# Altium PCB Charge.pcbdoc
Units mil, origin at the board's own origin, x right, y up, seen from the top; angles counter-clockwise.
Board outline 1110 x 2516.34 mil, 2 copper layers (Top Layer, Bottom Layer); 47 components, 34 nets, 137 pads, 73 vias.
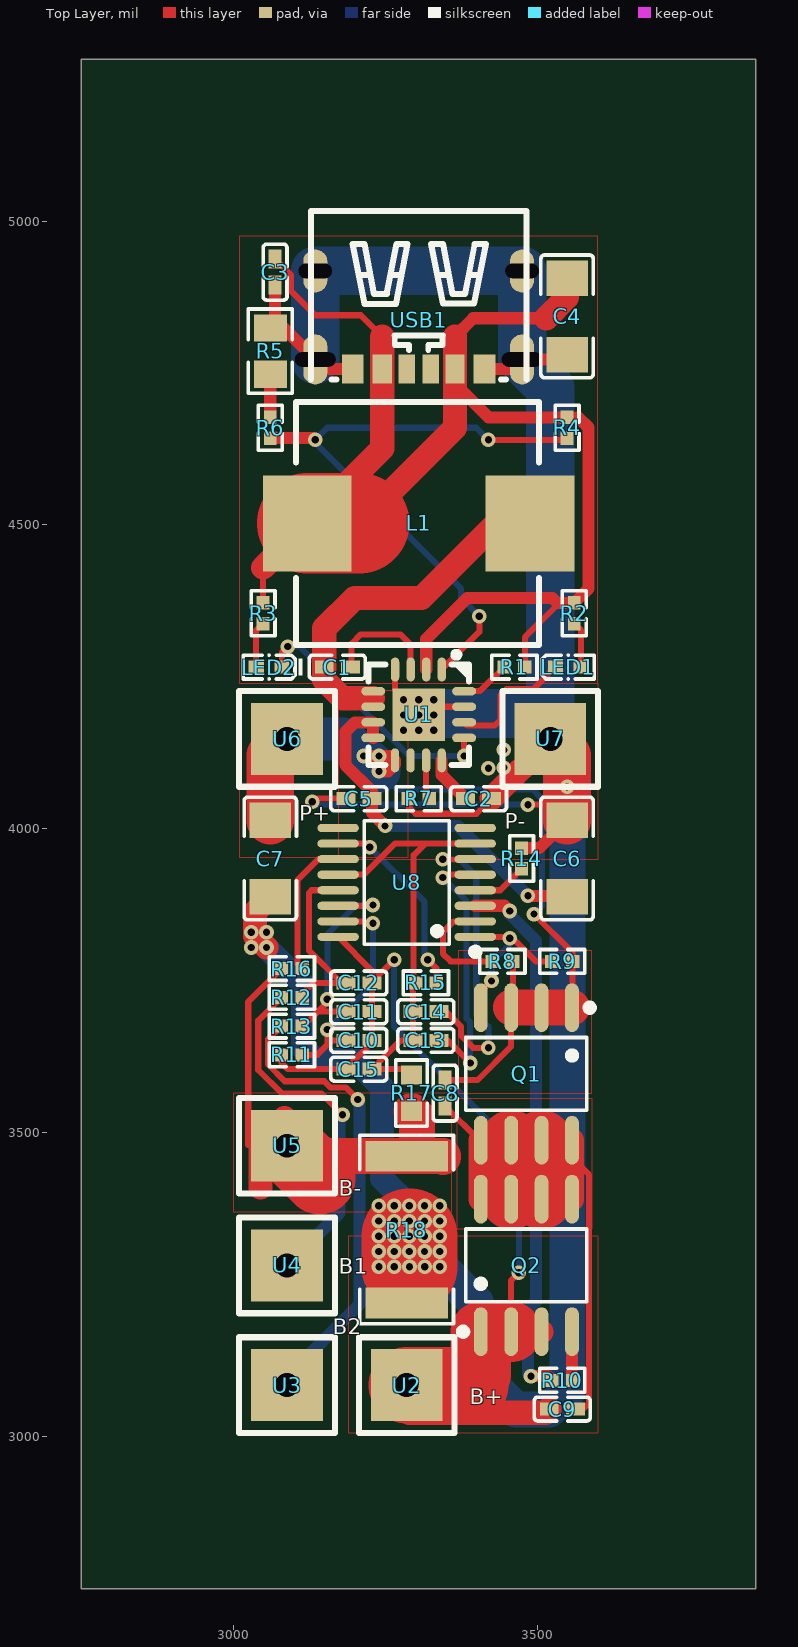
[diagram p0: Top Layer view]
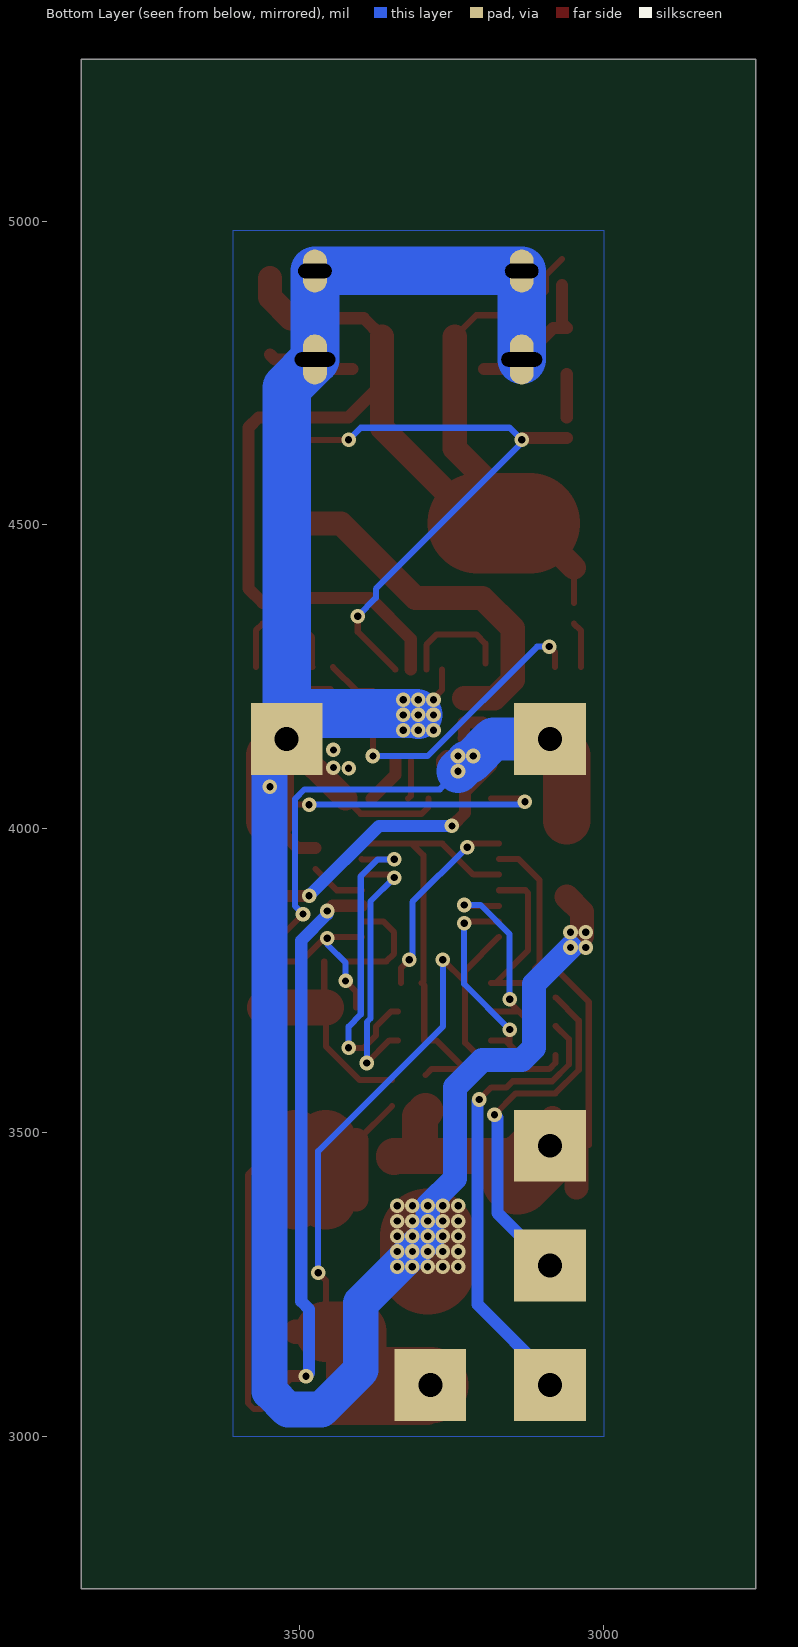
[diagram p1: Bottom Layer view, seen from below]

## Layer stack, top to bottom
Top Solder: solder mask 0.4, Solder Resist, Dk 3.5
Top Layer: signal copper 1.4
Dielectric 1: dielectric 12.6, FR-4, Dk 4.8
Bottom Layer: signal copper 1.4
Bottom Solder: solder mask 0.4, Solder Resist, Dk 3.5

## Board outline
3860,2750 2750,2750 2750,5266.34 3860,5266.34

## Components (designator, comment, footprint, x,y, rotation, side; value= is the part's Value field where it differs from the comment)
C1 "100nF" C0402 3171.42,4266.34 r0 top
C2 "470nF" C0402 3403.7,4049.8 r180 top
C3 "100nF" C0402 3069.06,4915.94 r90 top
C4 "CC1206KKX5R8BB226" C1206 3549.37,4843.11 r90 top
C5 "100nF" C0402 3206.85,4049.8 r0 top
C6 "CC1206KKX5R8BB226" C1206 3549.37,3951.38 r270 top
C7 "CC1206KKX5R8BB226" C1206 3061.18,3951.38 r90 top
C8 "100nF" C0402 3348.58,3565.55 r90 top
C9 "100nF" C0402 3541.5,3045.87 r0 top
C10 "100nF" C0402 3206.85,3652.17 r180 top
C11 "100nF" C0402 3206.85,3699.41 r180 top
C12 "100nF" C0402 3206.85,3746.65 r180 top
C13 "100nF" C0402 3317.09,3652.17 r0 top
C14 "100nF" C0402 3317.09,3699.41 r0 top
C15 "2.2uF" C0402 3206.85,3604.92 r180 top
L1 "2.2uH" IND-SMD_L10.8-W10.0 3305.28,4502.56 r0 top
LED1 "MHT136UGCT" LED0402-RD 3551.34,4266.34 r0 top
LED2 "MHT136CRCT" LED0402-RD 3059.21,4266.34 r180 top
Q1 "PT4407" SOP-8_L5.0-W4.0-P1.27-LS6.0-BL 3482.44,3597.05 r180 top
Q2 "PT4407" SOP-8_L5.0-W4.0-P1.27-LS6.0-BL 3482.44,3282.09 r0 top
R1 "10K" R0402 3462.76,4266.34 r0 top
R2 "10K" R0402 3561.18,4354.92 r90 top
R3 "10K" R0402 3049.37,4354.92 r90 top
R4 "10K" R0402 3549.37,4660.04 r90 top
R5 "10KΩ" R0805 3061.18,4786.02 r270 top
R6 "10K" R0402 3061.18,4660.04 r90 top
R7 "5.6K" R0402 3305.28,4049.8 r0 top
R8 "5.1K" R0402 3443.07,3782.09 r0 top
R9 "1M" R0402 3541.5,3782.09 r0 top
R10 "5.1K" R0402 3541.5,3093.11 r0 top
R11 "1K" R0402 3096.61,3628.54 r0 top
R12 "1K" R0402 3096.61,3723.03 r0 top
R13 "1K" R0402 3096.61,3675.79 r0 top
R14 "1K" R0402 3474.57,3951.38 r270 top
R15 "1K" R0402 3317.09,3746.65 r0 top
R16 "1K" R0402 3096.61,3770.28 r0 top
R17 "51Ω" R0603 3293.46,3565.55 r270 top
R18 "0.03Ω" R2512 3285.59,3341.14 r90 top
U1 "SLM6803" QFN-16_L4.0-W4.0-P0.65-BL-EP2.2 3305.28,4187.6 r180 top
U2 "BATTERY" BATTERY 3285.59,3085.24 r0 top
U3 "BATTERY" BATTERY 3088.74,3085.24 r0 top
U4 "BATTERY" BATTERY 3088.74,3282.09 r0 top
U5 "BATTERY" BATTERY 3088.74,3478.94 r0 top
U6 "BATTERY" BATTERY 3088.74,4148.23 r0 top
U7 "BATTERY" BATTERY 3521.81,4148.23 r0 top
U8 "FM8254AAV" TSSOP-16_L5.0-W4.4-P0.65-LS6.4-BL 3285.59,3912.01 r90 top
USB1 "U262-061N-4BVC10" TYPE-C-SMD_TYPE-C-31-M-16 3305.28,4837.2 r180 top

## Footprints (in the part's own frame and the unit in brackets; to place one, negate y for a bottom-side part, rotate by r counter-clockwise, add the part's x,y. Pads: shape width x height; smd on the part's side, far side on the other; paste and mask are expansions set on the pad)
BATTERY [mm]
  rect 3x3 hole 1: 1(0,0)
  silkscreen extent -2,-2 2,2
C0402 [mm]
  rect 0.79x0.54 smd: 1(-0.545,0) 2(0.545,0)
  silkscreen extent -1.17,-0.5 1.17,0.5
C1206 [mm]
  rect 1.485x1.728 smd: 1(-1.593,0) 2(1.593,0)
  silkscreen extent -2.56,-1.09 2.56,1.09
IND-SMD_L10.8-W10.0 [mm]
  rect 3.7x4 smd: 1(-4.65,0) 2(4.65,0)
  silkscreen extent -5.13,-5.08 5.03,5.08
LED0402-RD [mm]
  rect 0.636x0.54 smd: 1(-0.538,0) 2(0.538,0)
  silkscreen extent -1.39,-0.54 1.09,0.54
QFN-16_L4.0-W4.0-P0.65-BL-EP2.2 [mm]
  oval 0.35x1 smd: 1(-0.965,-1.9) 2(-0.315,-1.9) 3(0.335,-1.9) 4(0.986,-1.9) 9(0.991,1.9) 10(0.34,1.9) 11(-0.31,1.9) 12(-0.96,1.9)
  oval 1x0.35 smd: 5(1.9,-0.991) 6(1.9,-0.34) 7(1.9,0.31) 8(1.9,0.96) 13(-1.9,0.96) 14(-1.9,0.31) 15(-1.9,-0.34) 16(-1.9,-0.991)
  rect 2.2x2.2 smd: 17(0,0)
  silkscreen extent -2.11,-2.64 2.1,2.1
R0402 [mm]
  rect 0.566x0.54 smd: 1(-0.433,0) 2(0.433,0)
  silkscreen extent -0.94,-0.5 0.94,0.5
R0603 [mil]
  rect 31.75x34.02 smd: 1(-29.66,0) 2(29.66,0)
  silkscreen extent -55,-26 55,26
R0805 [mil]
  rect 44.59x54.21 smd: 1(-38.04,0) 2(38.04,0)
  silkscreen extent -69,-36 69,36
R2512 [mil]
  rect 50.49x136.06 smd: 1(-120.72,0) 2(120.72,0)
  silkscreen extent -155,-77 155,77
SOP-8_L5.0-W4.0-P1.27-LS6.0-BL [mil]
  oval 22.6x80.14 smd: 1(-75,-108.97) 2(-25,-108.97) 3(25,-108.97) 4(75,-108.97) 5(75,108.97) 6(25,108.97) 7(-25,108.97) 8(-75,108.97)
  silkscreen extent -110,-115 99,60
TSSOP-16_L5.0-W4.4-P0.65-LS6.4-BL [mil]
  oval 13.5x68.17 smd: 1(-89.57,-112.82) 2(-63.98,-112.82) 3(-38.39,-112.82) 4(-12.79,-112.82) 5(12.8,-112.82) 6(38.39,-112.82) 7(63.98,-112.82) 8(89.57,-112.82) 9(89.57,112.82) 10(63.98,112.82) 11(38.39,112.82) 12(12.8,112.82) 13(-12.79,112.82) 14(-38.39,112.82) 15(-63.98,112.82) 16(-89.57,112.82)
  silkscreen extent -120,-119 101,70
TYPE-C-SMD_TYPE-C-31-M-16 [mm]
  oval 1x2.1 hole 0.6 slot 1.7 at 0 deg: 1(-4.32,1.65) 2(4.32,1.65)
  oval 1x1.8 hole 0.6 slot 1.4 at 0 deg: 3(-4.32,-2.05) 4(4.32,-2.05)
  rect 0.7x1.2 smd: A5(-0.5,2.05) B5(0.5,2.05)
  rect 0.8x1.2 smd: A9(1.52,2.05) B9(-1.52,2.05)
  rect 0.9x1.2 smd: A12(2.75,2.05) B12(-2.75,2.05)
  silkscreen extent -4.5,-4.55 4.5,2.49

## Via types
v1: diameter 24, hole 12, Top Layer to Bottom Layer, 73 vias

## Nets (pads, with @x,y where several pads share a name; then routed paths per layer and width w, separated by ;. In a path a pad name is that pad's centre, name@x,y a point inside that pad or via, vN(x,y) a via of type N, cw(c..) or ccw(c..) an arc to the next point about the centre after c; other vN are vias at no path point)
12V6: C7.2 C8.2 Q1.1 Q1.2 Q1.3 R8.2 R9.2 U1.9 U6.1 | length 1445.7
  Top Layer w10: C8.2 3402.01,3587.01 3457.44,3642.44 Q1.3 3460.11,3708.69 R8.2 ; v1(3495,3860) 3558.54,3796.46 R9.2 3558.54,3707.11 Q1.1
  Top Layer w20: v1(3215,4120) v1(3240,4120) 3259.07,4120 U1.9 3266.28,4106.28 3255,4095 v1(3240,4095)
  Top Layer w40: U6.1@3061.18,4120.67 U6.1
  Top Layer w59.06: Q1.3 Q1.2 Q1.1
  Top Layer w78.74: C7.2 U6.1@3061.18,4120.67
  Bottom Layer w10: v1(3240,4095) 3270,4065 3492.53,4065 3508,4049.53 3508,3873 v1(3495,3860)
  Bottom Layer w70.87: U6.1 3181.77,4148.23 3220,4110 3225,4110 v1(3240,4095)
$1N58: R1.1 U1.16 | length 82.1
  Top Layer w10: U1.16 3405.98,4226.6 R1.1
$1N75: LED1.1 U1.14 | length 215.6
  Top Layer w10: U1.14 3385.47,4170 3430,4170 3440,4180 3440,4220 3450,4230 3493.81,4230 LED1.1
$1N87: LED2.1 U1.13 | length 432
  Top Layer w10: LED2.1 3080.4,4290.4 v1(3090,4300) ; v1(3380,4120) 3380.08,4120.08 U1.13
  Bottom Layer w10: v1(3090,4300) 3110,4300 3290,4120 v1(3380,4120)
$1N121: C2.2 U1.12 | length 79.2
  Top Layer w20: U1.12 3343.08,4088.97 C2.2
$1N133: R7.2 U1.11 | length 65
  Top Layer w10: U1.11 3317.48,4054.64 R7.2
$1N189: R4.1 R6.1 U1.1 | length 1022.2
  Top Layer w10: U1.1 3405,4324.12 v1(3405,4350) ; v1(3420,4640) 3546.37,4640 R4.1
  Top Layer w20: R6.1 3132,4643 v1(3135,4640)
  Bottom Layer w10: v1(3405,4350) 3375,4380 3375,4395 3135,4635 v1(3135,4640) 3155,4660 3400,4660 v1(3420,4640)
$1N209: C5.2 C6.2 U1.7 U1.8 | length 606.7
  Top Layer w20: U1.8 3230.08,4150.2 U1.7@3230.08,4175 ; U1.7 U1.7@3230.08,4175 ; v1(3250,4005) 3228.31,4026.69 C5.2 3228.31,4061.69 3185,4105 3185,4160 3200,4175 U1.7@3230.08,4175 ; v1(3485,3890) 3548.05,3890 C6.2
  Bottom Layer w20: v1(3250,4005) 3370,4005 v1(3485,3890)
$1N240: C1.1 L1.2 U1.5 U1.6 | length 587.3
  Top Layer w40: 3230,4215 3180,4215 3149.96,4245.04 C1.1 3149.96,4329.96 3200,4380 3310,4380 3432.56,4502.56 L1.2
$1N241: C1.2 U1.3 | length 183.5
  Top Layer w10: C1.2@3195,4272.4 3195,4305 3210,4320 3275,4320 3292.08,4302.92 U1.3
$1N315: C8.1 C9.2 Q1.5 Q1.6 Q1.7 Q1.8 Q2.5 Q2.6 Q2.7 Q2.8 | length 1062.3
  Top Layer w10: C8.1 3404.6,3488.08 Q1.5 ; Q2.8 Q2.7 ; Q1.6 Q1.7 ; Q2.6 Q2.5 ; Q1.8@3557.44,3459.31 3585.74,3431.01 3585.74,3055.74 3575.87,3045.87 C9.2
  Top Layer w40: Q2.8 Q1.5 ; Q2.5 3557.44,3459.31 Q1.8
  Top Layer w100: Q2.7 Q1.6 ; Q2.6 Q1.7
$1N375: Q2.4 R10.2 | length 80.5
  Top Layer w20: Q2.4 3557.44,3094.21 R10.2
$1N376: R10.1 U8.3 | length 887.7
  Top Layer w20: U8.3 3446.38,3873.62 v1(3455,3865) ; v1(3490,3100) 3517.57,3100 R10.1
  Bottom Layer w20: v1(3455,3865) 3455,3859.6 3498,3816.6 3498,3223 3485,3210 3485,3105 v1(3490,3100)
$1N377: R8.1 U8.2 | length 182.3
  Top Layer w10: U8.2 3363.03,3848.03 3345,3830 3345,3795 3357.91,3782.09 R8.1
$1N378: Q1.4 R9.1 U8.1 | length 276.4
  Top Layer w10: U8.1 3452.56,3822.44 v1(3455,3820) 3460,3820 3497.91,3782.09 R9.1 ; Q1.4 3407.44,3732.44 v1(3425,3750)
  Bottom Layer w10: v1(3425,3750) 3425,3780 3455,3810 v1(3455,3820)
$1N390: R14.2 U8.4 | length 90.7
  Top Layer w10: U8.4 3439.45,3899.22 R14.2
$1N415: C13.2 U8.5 | length 445.9
  Top Layer w10: C13.2 3352.83,3652.17 v1(3390,3615) ; v1(3345,3920) 3349.81,3924.81 U8.5
  Bottom Layer w10: v1(3345,3920) 3384,3881 3384,3688.37 3390,3682.37 v1(3390,3615)
$1N416: C14.2 U8.6 | length 525.3
  Top Layer w10: C14.2 3350.59,3699.41 3375,3675 3375,3660 3395,3640 v1(3420,3640) ; v1(3345,3950) 3398.02,3950 U8.6
  Bottom Layer w10: v1(3345,3950) 3372,3950 3400,3922 3400,3695 3420,3675 v1(3420,3640)
$1N417: C13.1 C14.1 C15.1 R15.1 R17.1 U8.7 U8.12 | length 738
  Top Layer w10: U8.12 3214.81,3924.81 3265.99,3975.99 3315.99,3975.99 ; R17.1 3283.75,3604.92 C15.1 3275.55,3652.17 C13.1 C14.1 3295.63,3742.23 R15.1 3299.54,3746.65 3297,3749.2 3297,3957 3315.99,3975.99 ; U8.7 3315.99,3975.99
$1N485: R16.2 U8.11 | length 229.7
  Top Layer w10: R16.2 3106.2,3777.73 3106.2,3916.2 3140.4,3950.4 U8.11
$1N497: C12.2 R12.2 U8.13 | length 304.8
  Top Layer w10: R12.2 3113.65,3728.65 3131.65,3746.65 C12.2@3178.35,3746.65 ; U8.13 3129.22,3899.22 3125,3895 3125,3800 C12.2@3178.35,3746.65 ; C12.2 C12.2@3178.35,3746.65
$1N498: C11.2 R13.2 U8.14 | length 368.3
  Top Layer w10: R13.2 3115.79,3675.79 3139.41,3699.41 ; v1(3155,3720) 3155,3715 3139.41,3699.41 ; U8.14 3228.62,3873.62 v1(3230,3875) ; C11.2 3139.41,3699.41
  Bottom Layer w10: v1(3155,3720) 3155,3827 3203,3875 v1(3230,3875)
$1N516: C10.2 R11.2 U8.15 | length 371
  Top Layer w10: R11.2 3138.54,3628.54 3162.17,3652.17 C10.2 ; 3155,3645.06 v1(3155,3670) ; U8.15 3226.97,3848.03 v1(3230,3845)
  Bottom Layer w10: v1(3155,3670) 3230,3745 v1(3230,3845)
$1N621: R15.2 U8.10 | length 323.3
  Top Layer w10: U8.10 3219.01,3975.99 v1(3225,3970) ; v1(3320,3785) 3334.13,3770.87 R15.2
  Bottom Layer w10: v1(3225,3970) 3315,3880 3315,3790 v1(3320,3785)
$1N626: LED1.2 R2.1 | length 76.2
  Top Layer w10: R2.1 3572.53,4326.53 LED1.2
$1N627: LED2.2 R3.1 | length 76.2
  Top Layer w10: LED2.2 3038.02,4326.53 R3.1
$1N630: R5.2 R6.2 | length 70.9
  Top Layer w20: R6.2 R5.2
B1: R12.1 U4.1 | length 590
  Top Layer w10: R12.1 3041.44,3684.9 3041.44,3603.56 3080,3565 3145,3565 v1(3180,3530)
  Bottom Layer w20: U4.1 3175,3368.35 3175,3525 v1(3180,3530)
B2: R13.1 U3.1 | length 764.5
  Top Layer w10: R13.1 3079.07,3675.79 3057.44,3654.16 3057.44,3612.56 3085,3585 3150,3585 3160,3575 3185,3575 v1(3205,3555)
  Bottom Layer w20: U3.1 3088.74,3098.74 3208,3218 3208,3552 v1(3205,3555)
B+: C9.1 C10.1 C11.1 C12.1 C15.2 Q2.1 Q2.2 Q2.3 R11.1 U2.1 U8.16 | length 1714.7
  Top Layer w10: R11.1 3080,3628.12 3080,3615 3090.08,3604.92 C15.2 3185.39,3605.39 3228.31,3648.31 C10.1 C11.1 C12.1 C12.1@3228.31,3748.31 ; U8.16 3228.31,3766.89 C12.1@3228.31,3748.31 ; v1(3265,3785) C12.1@3228.31,3748.31 ; Q2.2 3457.44,3257.44 v1(3470,3270)
  Top Layer w40: U2.1 3285.59,3044.41 3290,3040 3514.17,3040 C9.1 ; Q2.2 Q2.3
  Top Layer w100: 3390.24,3085.24 3407.44,3102.44 Q2.1 Q2.2
  Top Layer w125.98: U2.1 3390.24,3085.24
  Bottom Layer w10: v1(3265,3785) 3265,3675 3470,3470 v1(3470,3270)
B-: R16.1 R17.2 R18.2 U5.1 | length 899.9
  Top Layer w10: 3025,3480 3025,3715.7 R16.1 ; U5.1@3030,3475 3045,3475 U5.1@3084.8,3475
  Top Layer w39.37: 3045,3410 3045,3475 3045,3485 U5.1@3084.8,3524.8
  Top Layer w59.06: U5.1@3107.68,3461.86 R18.2 ; R17.2 3302.43,3526.93 3302.43,3478.7 R18.2 ; R18.2@3345,3460 R18.2@3343.14,3461.86 ; R18.2@3345,3461.86 R18.2@3343.14,3461.86 ; R18.2 R18.2@3343.14,3461.86
  Top Layer w118.11: U5.1 U5.1@3142.68,3425
GND: C2.1 C3.1 C4.1 C5.1 C6.1 C7.1 R5.1 R7.1 R14.1 R18.1 U1.4 U1.15 U1.17 U7.1 USB1.1 USB1.2 USB1.3 USB1.4 USB1.A12 USB1.B12 | length 5398.5
  Top Layer w10: v1(3130,4045) 3134.8,4049.8 C5.1 ; U1.4 3266.48,4228.52 3305.28,4189.72 v1(3305.28,4187.6) 3318.68,4201 U1.15 ; R7.1 3288.24,4036.76 3300,4025 3400.36,4025 C2.1 ; v1(3485,4040) 3523.45,4040 C6.1
  Top Layer w20: C3.1 3069.06,4831.94 R5.1 3083.38,4824.06 USB1.2 3150.95,4756.49 USB1.A12 ; USB1.B12 3459.6,4756.49 3475.35,4772.24 3541.2,4772.24 C4.1 ; R14.1 3503.71,3968.42 C6.1
  Top Layer w39.37: C2.1 3521.81,4146.45 U7.1
  Top Layer w40: v1(3055,3805) 3036,3824 3036,3863.5 C7.1
  Top Layer w78.74: U7.1 3549.37,4120.67 v1(3549.37,4069.23) C6.1
  Top Layer w157.48: v1@3290,3280.12 v1(3290,3305) v1(3290,3330)
  Bottom Layer w10: v1(3130,4045) 3135,4040 v1(3485,4040)
  Bottom Layer w40: v1(3055,3805) 3115,3745 3115,3640 3135,3620 3200,3620 3245,3575 3245,3425 v1(3290,3380) v1(3290,3355) v1(3290,3330)
  Bottom Layer w59.06: v1(3290,3330) v1(3315,3305) 3327.5,3292.5 ; 3327.56,3292.44 3340.06,3279.94 3400,3220 3400,3110 3465,3045 3520,3045 3550,3075 3550,4120.04 U7.1
  Bottom Layer w80: USB1.2 USB1.4 3475.35,4917.91 3475.35,4772.24 3521.81,4725.78 U7.1 3480.04,4190 3307.68,4190 v1(3305.28,4187.6)
  other v1: 3239.88,3280 3265.12,3280 3290.12,3280 3315.12,3280 3340.12,3280 3239.77,3305 3265,3305 3340,3305 3239.77,3330 3265,3330 3315,3330 3340,3330 3239.77,3355 3265,3355 3315,3355 3340,3355 3239.77,3380 3265,3380 3315,3380 3340,3380 3030,3805 3030,3830 3055,3830 3420,4100 3445,4100.98 3445,4130 3280.28,4162.6 3305.28,4162.6 3330.28,4162.6 3280.28,4187.6 3330.28,4187.6 3280.28,4212.6 3305.28,4212.6 3330.28,4212.6
VIN: C3.2 C4.2 L1.1 R1.2 R2.2 R3.2 R4.2 U1.2 USB1.A9 USB1.B9 | length 2458.6
  Top Layer w10: R3.2 3049.37,4429.72 ; C3.2 3095,4911.46 3095,4885 3135,4845 3210,4845 3245.43,4809.57 ; R1.2 3480,4266.54 3480,4315 3531.96,4366.96
  Top Layer w20: U1.2 3317.68,4312.68 3385,4380 3525,4380 3533.04,4371.96 R2.2 3584.55,4395.33 3584.55,4660.45 3567.92,4677.08 R4.2 3420.07,4677.08 3365.12,4732.03 ; 3365.12,4810.12 3395,4840 3515,4840
  Top Layer w39.37: 3049.37,4429.72 L1.1
  Top Layer w40: L1.1 3245.43,4625.78 USB1.A9 3245.43,4809.57 ; 3207.56,4502.56 3365.12,4660.12 3365.12,4732.03 USB1.B9 3365.12,4810.12 ; 3515,4840 3549.37,4874.37 C4.2
  Top Layer w165.35: L1.1 3207.56,4502.56
"": 
pads on no net: U1.10 U8.8 U8.9 USB1.A5 USB1.B5

## Polygon pours and split planes (outlines as drawn)
GND on Bottom Layer (solid, remove dead copper): 3000,3000 3610,3000 3610,4985 3000,4985
B- on Top Layer (solid, remove dead copper, pour order 1): 3000,3370 3360,3370 3360,3565 3000,3565
$1N315 on Top Layer (solid, remove dead copper, pour order 2): 3368.23,3341.99 3591.14,3341.99 3591.14,3556.64 3368.23,3556.64
B+ on Top Layer (solid, remove dead copper, pour order 3): 3189.68,3006.5 3600.55,3006.5 3600.55,3330 3189.68,3330
12V6 on Top Layer (solid, remove dead copper, pour order 4): 3010,3953.63 3287.91,3953.63 3287.91,4226.97 3010,4226.97
12V6 on Top Layer (solid, remove dead copper, pour order 5): 3370,3565 3590,3565 3590,3800 3370,3800
VIN on Top Layer (solid, remove dead copper, pour order 6): 3010,4240 3600,4240 3600,4975 3010,4975
GND on Top Layer (solid, remove dead copper, pour order 7): 3172.76,3950.38 3600.55,3950.38 3600.55,4238.77 3172.76,4238.77

## Silkscreen, mask and mechanical layers (free items; w line width, h text height)
Top Overlay:
  text "P+" at 3108.94,4013.74 h25.55
  text "P-" at 3446.9,4000.67 h25.55
  text "B-" at 3173.94,3396.87 h25.55
  text "B1" at 3173.94,3268.74 h25.55
  text "B2" at 3163.94,3168.74 h25.55
  text "B+" at 3389.18,3053.98 h25.55
Mechanical 1:
  lines w10: 3010,3006.5 3010,4975 3600.55,4975 3600.55,3006.5 3010,3006.5